# Altium PCB PCB1.PcbDoc
Units mil, origin at the board's own origin, x right, y up, seen from the top; angles counter-clockwise.
Board outline 1683.57 x 2460.03 mil, 2 copper layers (Top Layer, Bottom Layer); 24 components, 14 nets, 72 pads, 13 vias.
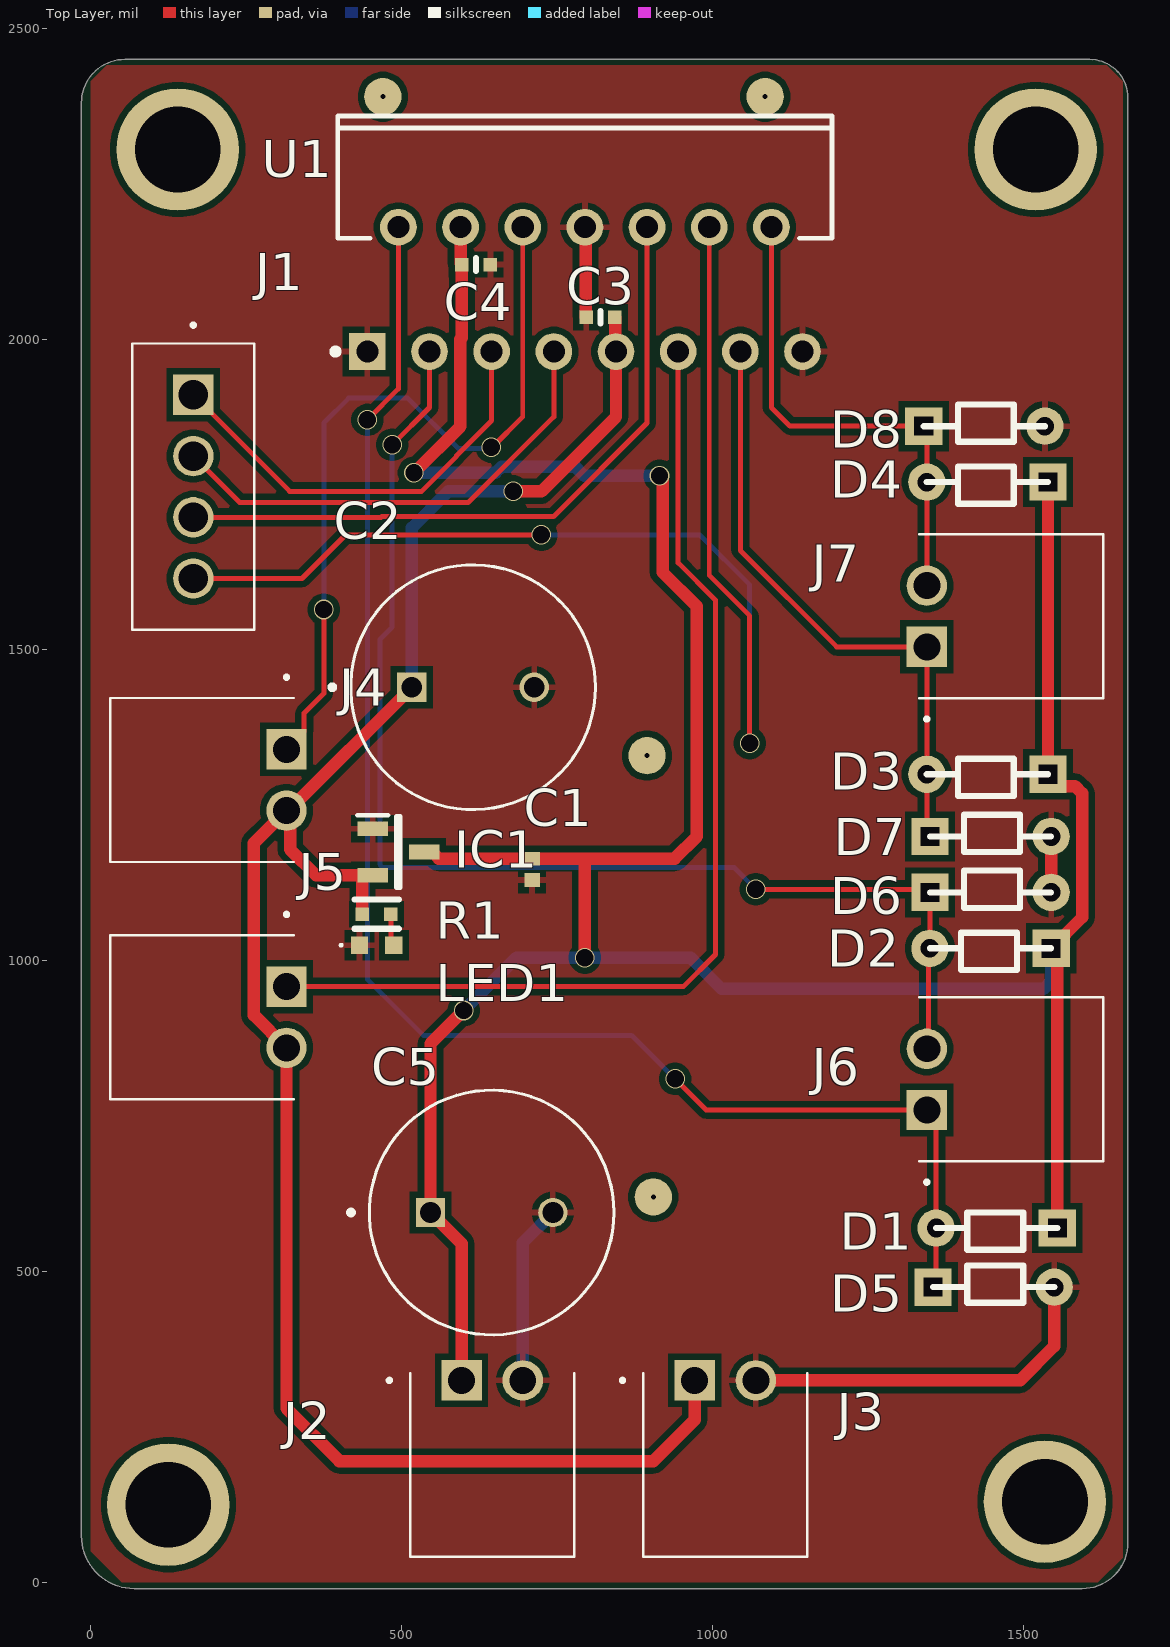
[diagram p0: Top Layer view]
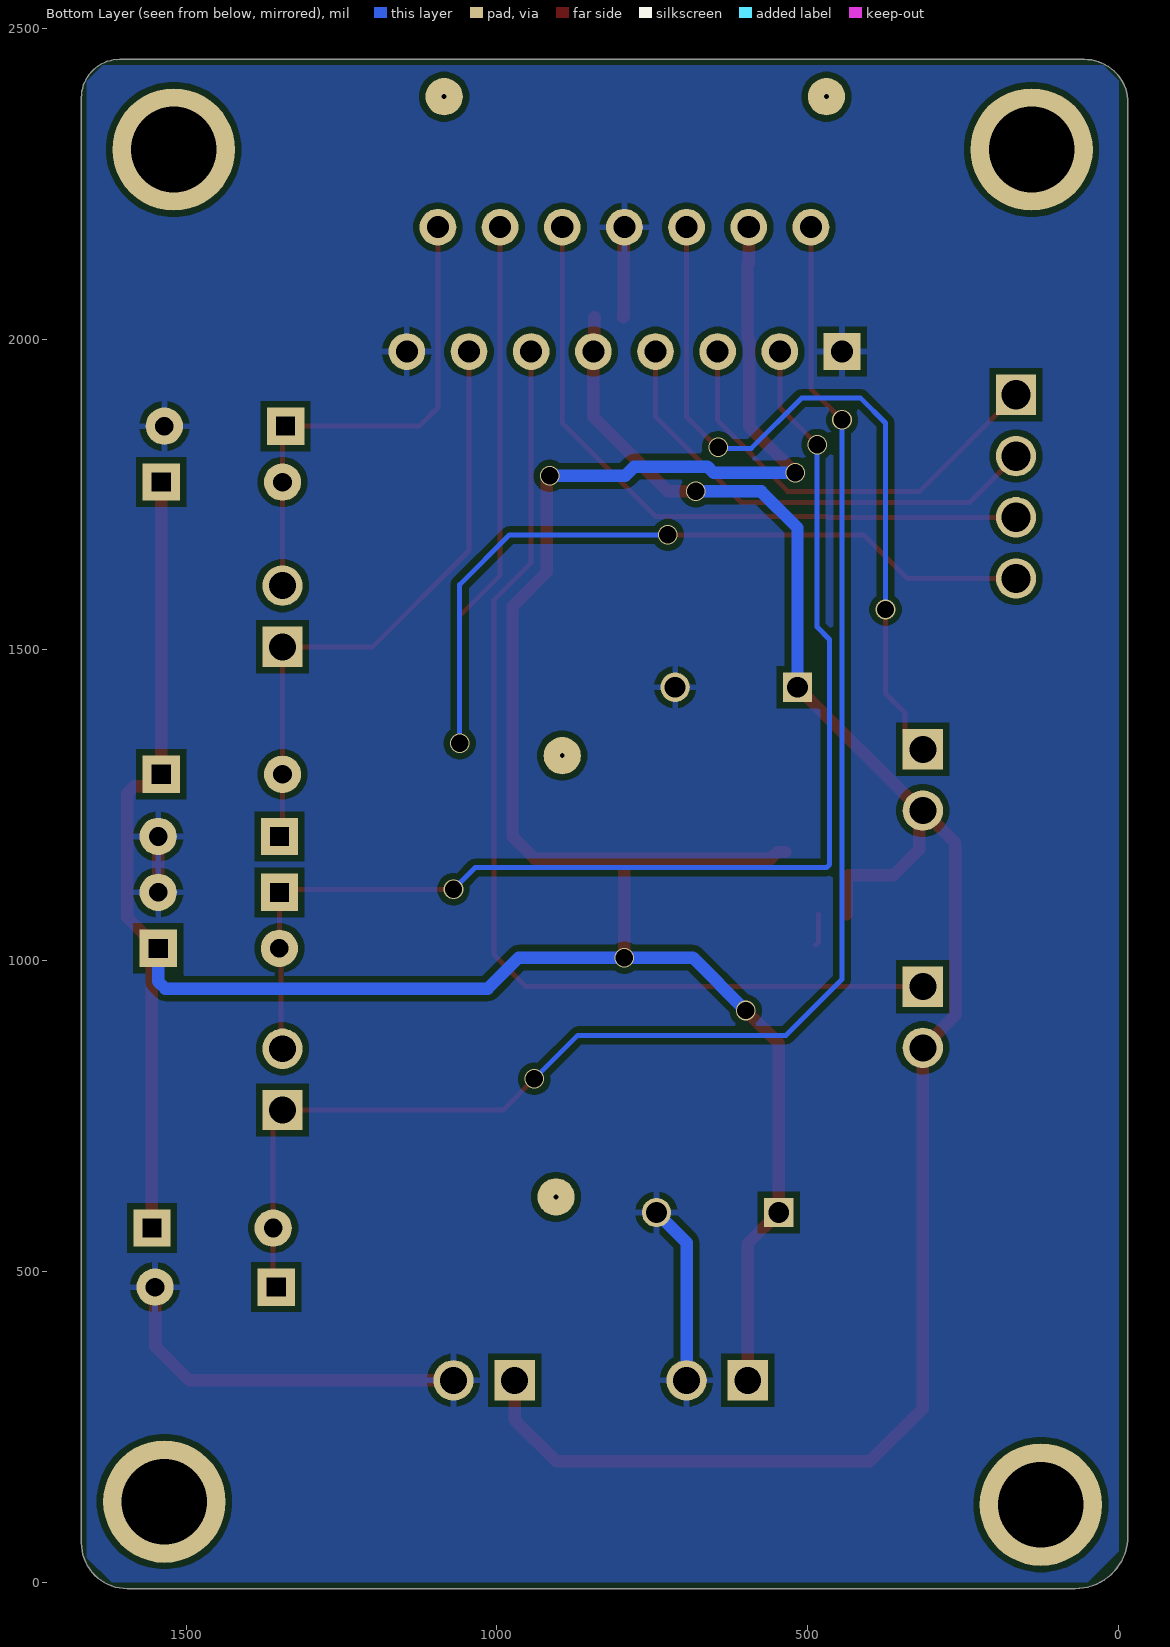
[diagram p1: Bottom Layer view, seen from below]
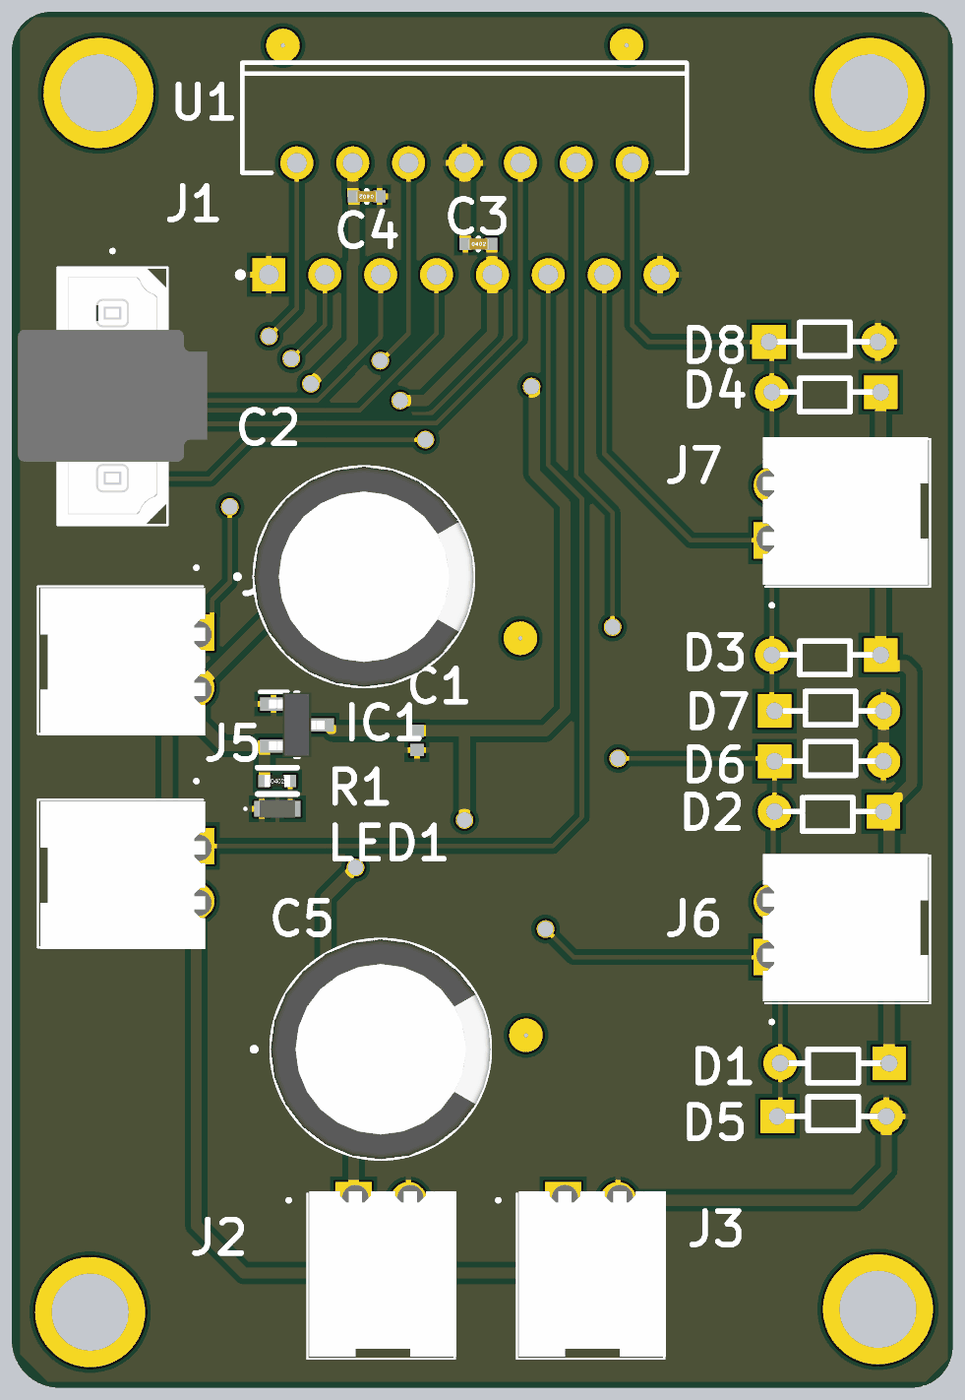
[diagram p2: 3D render of the assembled board from above, using the file's embedded part models]

## Layer stack, top to bottom
Top Solder: solder mask 0.4, Solder Resist, Dk 3.5
Top Layer: signal copper 1.4
Dielectric 1: dielectric 12.6, FR-4, Dk 4.8
Bottom Layer: signal copper 1.4
Bottom Solder: solder mask 0.4, Solder Resist, Dk 3.5

## Board outline
70,-10.01 cw(c70,75) -15.01,75 -15.01,2380 cw(c55,2380) 55,2450.01 1607.09,2450.01 cw(c1607.09,2388.54) 1668.56,2388.54 cw(c1653.54,2388.54) 1668.56,2388.49 1668.56,63.54 cw(c1595,63.54) 1595.06,-10.01 cw(c1595.03,8.37) 1595,-10.01 ccw(c1595.02,5) 1595.06,-10.01 1595,-10.01

## Design rules (kind name [scope] priority, off if disabled: settings)
Clearance [All] p1: gap=10 ignorepadtopadclearanceinfootprint=FALSE except(0: Arc-Hole Track-Hole SMDPad-Hole THPad-Hole Via-Hole Fill-Hole Poly-Hole Region-Hole Text-Hole)
PolygonConnect [All] p1: connectstyle=Relief reliefconductorwidth=10 reliefentries=4 polygonreliefangle="90 Angle" airgapwidth=10
RoutingVias [All] p1: holewidth=28.74 width=31.5 viastyle="Through Hole" minholewidth=7.87 minwidth=19.68 maxholewidth=29.53 maxwidth=31.5
SolderMaskExpansion [All] p1: expansion=4 istentingtop=FALSE
Width [All] p1: maxlimit=100 minlimit=6 preferedwidth=10 minimp=50.000000 maximp=50.000000 favimp=50.000000
30 further rules are at their usual default settings.

## Classes and differential pairs
component class Sheet1: C1 C2 C3 C4 C5 D1 D2 D3 D4 D5 D6 D7 D8 IC1 J1 LED1 R1 U1

## Components (designator, comment, footprint, x,y, rotation, side; value= is the part's Value field where it differs from the comment)
C1 "GRM155R61H105KE05D" CAPC1005X60N 710,1147.13 r90 top
C2 "ECA1HM221" CAPPRD500W60D1000H1250 615,1440 r0 top
C3 "0.10µF" SMD-0402C 820,2035 r270 top
C4 "0.10µF" SMD-0402C 620,2120 r90 top
C5 "ECA1HM221" CAPPRD500W60D1000H1250 645,595 r0 top
D1 "1N4007-E3_73" PCBComponent_1 1555,570 r180 top
D2 "1N4007-E3_73" PCBComponent_1 1545,1020 r180 top
D3 "1N4007-E3_73" PCBComponent_1 1540,1300 r180 top
D4 "1N4007-E3_73" PCBComponent_1 1540,1770 r180 top
D5 "1N4007-E3_73" PCBComponent_1 1355,475 r0 top
D6 "1N4007-E3_73" PCBComponent_1 1350,1110 r0 top
D7 "1N4007-E3_73" PCBComponent_1 1350,1200 r0 top
D8 "1N4007-E3_73" PCBComponent_1 1340,1860 r0 top
IC1 "MCP1799T-5002H_TT" SOT95P237X112-3N 495,1175 r0 top
J1 "1815280" 1815280 165,1910.28 r270 top
J2 "1814841" 1814841 596.57,325 r0 top
J3 "1814841" 1814841 971.57,325 r0 top
J4 "1814841" 1814841 315,1340 r270 top
J5 "1814841" 1814841 315,958.43 r270 top
J6 "1814841" 1814841 1345,760 r90 top
J7 "1814841" 1814841 1345,1505 r90 top
LED1 "LSM0603412V" LSM0603412V 460,1025 r0 top
R1 "1k" SMD-0402-RES 460,1075 r270 top
U1 "L298N" STM-FM-15 795,2080 r90 top

## Footprints (in the part's own frame and the unit in brackets; to place one, negate y for a bottom-side part, rotate by r counter-clockwise, add the part's x,y. Pads: shape width x height; smd on the part's side, far side on the other; paste and mask are expansions set on the pad)
1814841 [mm]
  rect 1.65x1.65 hole 1.1: 1(0,0)
  round 1.65 hole 1.1: 2(2.5,0)
  silkscreen extent -3,-7.2 4.6,0.3, body extent -2.02,-7.1 4.68,0.7, height 5.5
1815280 [mm]
  rect 1.65x1.65 hole 1.2: 1(0,0)
  round 1.65 hole 1.2: 2(2.5,0) 3(5,0) 4(7.5,0)
  silkscreen extent -2.9,-2.5 9.6,2.5, body extent -2.13,-4.3 9.57,4.3, height 8.2
CAPC1005X60N [mm]
  rect 0.56x0.63 smd: 1(-0.435,0) 2(0.435,0)
CAPPRD500W60D1000H1250 [mm]
  round 1.2 hole 0.85: N(2.5,0)
  rect 1.2x1.2 hole 0.85: P(-2.5,0)
  silkscreen extent -5.85,-5 5,5, body extent -5,-5 5,5, height 12.5
LSM0603412V [mm]
  rect 0.7x0.7 smd: 1(-0.7,0) 2(0.7,0)
  silkscreen extent -1.5,-0.05 -1.4,0.05, body extent -0.8,-0.4 0.8,0.4, height 0.75
PCBComponent_1 [mil]
  rect 60x60 hole 30 square: 1(0,0)
  round 60 hole 30: 2(195,0)
  silkscreen extent 0,-25 195,35
SMD-0402-RES [mm]
  rect 0.55x0.55 smd: 1(0,0.584) 2(0,-0.584)
  silkscreen extent -0.6,-0.9 0.6,0.9, body extent -0.28,-0.57 0.27,0.58, height 0.41
SMD-0402C [mm]
  rect 0.55x0.55 smd: 1(0,0.584) 2(0,-0.584)
  silkscreen extent -0.25,0 0.25,0, body extent -0.25,-0.51 0.25,0.51, height 0.51
SOT95P237X112-3N [mm]
  rect 1.25x0.6 smd: 1(-1.05,0.95) 2(-1.05,-0.95) 3(1.05,0)
  silkscreen extent -1.68,-1.46 0.08,1.5, body extent -1.27,-1.46 1.27,1.46, height 1
STM-FM-15 [mm] "FM, 15-Leads, Body 20.2x5mm, Pitch 1.27mm"
  rect 1.5x1.5 hole 0.9: 1(-2.54,8.89)
  round 1.5 hole 0.9: 2(2.54,7.62) 3(-2.54,6.35) 4(2.54,5.08) 5(-2.54,3.81) 6(2.54,2.54) 7(-2.54,1.27) 8(2.54,0) 9(-2.54,-1.27) 10(2.54,-2.54) 11(-2.54,-3.81) 12(2.54,-5.08) 13(-2.54,-6.35) 14(2.54,-7.62) 15(-2.54,-8.89)
  silkscreen extent -2.66,-10.1 7.09,10.31, body extent -2.8,-10.1 7.09,10.1, height 21

## Part data
C1: "Capacitor Ceramic Multilayer (MLCC)", Package=None, Availability=Unavailable, MF="{'manufacturer': u'Murata'}", MP=GRM155R61H105KE05D, Price=None
C2 C5: "M-A", Package=None, Availability=Unavailable, MF="{'manufacturer': u'Panasonic'}", MP=ECA1HM221, Price=None
C3 C4: library part GRM155R61H104KE14D, "CAP CER 0.1UF 50V X5R 0402", Digi-Key Part Number=490-10697-1-ND, Manufacturer="Murata Electronics North America", Operating Temperature="-55°C ~ 85°C", Package / Case="0402 (1005 Metric)", Ratings=-, Temperature Coefficient=X5R, Tolerance=±10%, Voltage=50V, @ qty=0, Applications="General Purpose", Datasheets=http://www.murata.com/~/media/webrenewal/support/library/catalog/products/capacitor/mlcc/c02e.pdf, Factory Stock=0, Features=-, Height - Seated (Max)=-, Image=//media.digikey.com/Renders/Murata%20Renders/ZRB-SERIES-0402.jpg, Lead Spacing=-, Lead Style=-, Minimum Quantity=1, Mounting Type="Surface Mount, MLCC", Packaging="Cut Tape (CT)", Part Number=GRM155R61H104KE14D, Part Status=Active, Quantity Available=329219, Series=GRM, Size / Dimension="0.039\" L x 0.020\" W (1.00mm x 0.50mm)", Thickness (Max)="0.022\" (0.55mm)", Unit Price (USD)=0.1
D1 D2 D3 D4 D5 D6 D7 D8: "Diode", Arrow Part Number=1N4007-E3/73, Manufacturer_Name=Vishay, Mouser Part Number=625-1N4007-E3/73, Arrow Price/Stock=https://www.arrow.com/en/products/1n4007-e373/vishay?region=europe, Datasheet Link=https://mouser.componentsearchengine.com/Datasheets/2/1N4007-E3_73.pdf, Manufacturer_Part_Number=1N4007-E3/73, Mouser Price/Stock=https://www.mouser.co.uk/ProductDetail/Vishay-General-Semiconductor/1N4007-E3-73?qs=N4vtoAxH%2FSqT3Ng3e4K0Gw%3D%3D
IC1: "Integrated Circuit", Arrow Part Number=MCP1799T-5002H/TT, Manufacturer_Name=Microchip, Mouser Part Number=579-CP1799T-5002H/TT, Arrow Price/Stock=https://www.arrow.com/en/products/mcp1799t-5002htt/microchip-technology?region=nac, Datasheet Link=https://eu.mouser.com/datasheet/2/268/MCP1799-Data-Sheet-20006248A-1658571.pdf, Height=1.12mm, Manufacturer_Part_Number=MCP1799T-5002H/TT, Mouser Price/Stock=https://www.mouser.co.uk/ProductDetail/Microchip-Technology/MCP1799T-5002H-TT?qs=BJlw7L4Cy7%2Fnzou%252BAWMPCQ%3D%3D
J1: "Connector", Manufacturer_Name="Phoenix Contact", Mouser Part Number=651-1815280, Arrow Part Number=1815280, Arrow Price/Stock=https://www.arrow.com/en/products/1815280/phoenix-contact?region=nac, Datasheet Link=http://www.phoenixcontact.com/de/produkte/1815280/pdf, Height=7.65mm, Manufacturer_Part_Number=1815280, Mouser Price/Stock=https://www.mouser.co.uk/ProductDetail/Phoenix-Contact/1815280?qs=eTPcRhULBzzcAjjk%252B9Eddw%3D%3D
J2 J3 J4 J5 J6 J7: "Connector", Manufacturer_Name="Phoenix Contact", Mouser Part Number=651-1814841, Arrow Part Number=1814841, Arrow Price/Stock=https://www.arrow.com/en/products/1814841/phoenix-contact?region=nac, Datasheet Link=http://www.phoenixcontact.com/de/produkte/1814841/pdf, Height=5.1mm, Manufacturer_Part_Number=1814841, Mouser Price/Stock=https://www.mouser.co.uk/ProductDetail/Phoenix-Contact/1814841?qs=eTPcRhULBzwaAeA3B4lirA%3D%3D
LED1: "LED", Manufacturer_Name="Visual Communications Company", Mouser Part Number=593-LSM0603412V, Arrow Part Number=LSM0603412V, Arrow Price/Stock=https://www.arrow.com/en/products/lsm0603412v/visual-communications?region=nac, Datasheet Link=https://vcclite.com/wp-content/uploads/wpallimport/files/files/LSM0603412V.pdf, Height=0.65mm, Manufacturer_Part_Number=LSM0603412V, Mouser Price/Stock=https://www.mouser.co.uk/ProductDetail/VCC/LSM0603412V?qs=%252BEew9%252B0nqrCIKpXilSWEhA%3D%3D
R1: library part ERJ-2GEJ102X, "RES SMD 1K OHM 5% 1/10W 0402", Digi-Key Part Number=P1.0KJCT-ND, Manufacturer="Panasonic Electronic Components", Operating Temperature="-55°C ~ 155°C", Package / Case="0402 (1005 Metric)", Power (Watts)="0.1W, 1/10W", Supplier Device Package=0402, Temperature Coefficient=±200ppm/°C, Tolerance=±5%, @ qty=1500, Composition="Thick Film", Datasheets=http://industrial.panasonic.com/www-cgi/jvcr13pz.cgi?E+PZ+3+AOA0001+ERJ2GEJ102X+7+WW, Factory Stock=0, Failure Rate=-, Features="Automotive AEC-Q200", Height - Seated (Max)="0.016\" (0.40mm)", Image=//media.digikey.com/Photos/Panasonic%20Photos/ERJ-PA2-Series.jpg, Minimum Quantity=1, Number of Terminations=2, Packaging="Cut Tape (CT)", Part Number=ERJ-2GEJ102X, Part Status=Active, Quantity Available=1939857, Series=ERJ, Size / Dimension="0.039\" L x 0.020\" W (1.00mm x 0.50mm)", Unit Price (USD)=0.00350
U1: library part CMP-2000-06526-1, "Dual Full-Bridge Driver, 4.8 to 46 V, -40 to 150 degC, 15-Pin FM (MW 15L), RoHS, Tube", Driver Case Style=Multiwatt, Manufacturer=STMicroelectronics, Operating Temperature Max=130°C, Operating Temperature Min=-25°C, Output Current=2A, Output Voltage=46V, Package Description="15-Pin Flange Mount, Body 5 x 19.6 mm, Pitch 1.27 mm", Package Reference=FM-15, PartNumber=L298, Supply Voltage Max=7V, Supply Voltage Min=4.5V, Automotive Qualification Standard=-, Datasheet URL=https://datasheet.ciiva.com/15109/getdatasheetpartid-50682-15109332.pdf, Datasheet Version=01/2000, Manufacturer URL=http://www.st.com/, Motor Type=FullBridge, Mounting Technology=ThroughHole, MSL=-, No. of Outputs=4Outputs, No. of Pins=15Pins, Packaging=Each, Product Range=-, SVHC=NoSVHC(17-Dec-2015)

## Free pads (board coordinates)
  round 196.85 hole 137.8: 13(125,125) 13(140,2305) 13(1520,2305) 13(1535,130)
  round 60 hole 8: 14(470,2390) 15(1085,2390)
  round 60 hole 8 unplated: 16(895,1330) 17(905,620)

## Via types
v1: diameter 31.5, hole 28, Top Layer to Bottom Layer, 13 vias

## Nets (pads, with @x,y where several pads share a name; then routed paths per layer and width w, separated by ;. In a path a pad name is that pad's centre, name@x,y a point inside that pad or via, vN(x,y) a via of type N, cw(c..) or ccw(c..) an arc to the next point about the centre after c; other vN are vias at no path point)
+5V: C2.P C3.1 IC1.2 J3.1 J4.2 J5.2 R1.2 U1.9 | length 3151
  Top Layer w20: R1.2 437,1135.6 435,1137.6 362.4,1137.6 320.91,1179.09 320.91,1235.67 J4.2 ; C2.P 318.15,1241.57 J4.2 ; v1(680,1755) 725,1755 845,1875 U1.9 843.83,1981.17 843.83,2034.17 C3.1 ; J3.1 971.57,261.57 905,195 400,195 315,280 J5.2 262.52,912.48 262.52,1189.09 J4.2
  Bottom Layer w20: C2.P 516.57,1696.57 575,1755 v1(680,1755)
EN-A: J4.1 U1.6 | length 1245.9
  Top Layer w8: J4.1 343.48,1368.48 343.48,1398.48 375,1430 v1(375,1565) ; v1(644.25,1826.38) 646.38,1826.38 695,1875 U1.6
  Bottom Layer w8: v1(375,1565) 375,1865 415,1905 510,1905 590.75,1824.25 642.12,1824.25 v1(644.25,1826.38)
EN-B: J5.1 U1.11 | length 1706.2
  Top Layer w8: J5.1 953.43,958.43 1005,1010 1005,1580 945,1640 U1.11
GND: C1.1 C2.N C3.2 C4.2 C5.N D5.2 D6.2 D7.2 D8.2 IC1.1 J2.2 J3.2 LED1.1 U1.1 U1.8 U1.15 | length 1123.7
  Top Layer w20: U1.8 796.17,2178.83 796.17,2035.83 C3.2 ; J3.2 1495,325 1550,380 D5.2 ; D6.2 D7.2
  Bottom Layer w20: J2.2 695,546.57 C5.N
INPUT1: J1.1 U1.5 | length 703
  Top Layer w8: J1.1 320.02,1755.25 532.32,1755.25 588.66,1811.59 588.66,1812.87 645,1869.21 U1.5
INPUT2: J1.2 U1.7 | length 773
  Top Layer w8: J1.2 239.6,1737.25 607.25,1737.25 745,1875 U1.7
INPUT3: J1.3 U1.10 | length 1107.8
  Top Layer w8: J1.3 467.37,1713.43 468.69,1714.75 744.75,1714.75 895,1865 U1.10
INPUT4: J1.4 U1.12 | length 2069.1
  Top Layer w8: J1.4 340,1615 410,1685 v1(725,1685) ; U1.12 995,1620 1060,1555 v1(1060,1350)
  Bottom Layer w8: v1(725,1685) 980,1685 1060,1605 v1(1060,1350)
NetLED1_2: LED1.2 R1.1 | length 51.9
  Top Layer w8: R1.1 483,1029.56 LED1.2
OUTPUT1: D1.2 D5.1 J6.1 U1.2 | length 2511
  Top Layer w8: v1(445,1870) 495,1920 U1.2 ; v1(940,810) 990,760 J6.1 1360,745 D1.2 1360,480 D5.1
  Bottom Layer w8: v1(445,1870) 445,970 535,880 870,880 v1(940,810)
OUTPUT2: D2.2 D6.1 J6.2 U1.3 | length 2015.6
  Top Layer w8: v1(485,1830) 545,1890 U1.3 ; v1(1070,1115) 1345,1115 D6.1 D2.2 1347.5,1017.5 1347.5,860.93 J6.2
  Bottom Layer w8: v1(485,1830) 485,1536.82 465,1516.82 465,1154.69 469.69,1150 1035,1150 v1(1070,1115)
OUTPUT3: D3.2 D7.1 J7.1 U1.13 | length 991.3
  Top Layer w8: U1.13 1045,1660 1200,1505 J7.1 D3.2 1345,1205 D7.1
OUTPUT4: D4.2 D8.1 J7.2 U1.14 | length 806.1
  Top Layer w8: U1.14 1095,1890 1125,1860 D8.1 1345,1855 D4.2 J7.2
VCC: C1.2 C4.1 C5.P D1.1 D2.1 D3.1 D4.1 IC1.3 J2.1 U1.4 | length 5013.1
  Top Layer w20: v1@520,1784.25 v1(520,1785) 594.53,1859.53 594.53,1999.57 597,2002.04 C4.1 595,2122 U1.4 ; IC1.3 549.13,1175 559.88,1164.25 C1.2@708.62,1164.25 ; J2.1 596.57,545 C5.P 546.57,866.57 v1(600,920) ; C1.2 795,1164.25 ; v1(795,1005) 795,1164.25 ; v1(915,1780) 920,1775 920,1625 975,1570 975,1200 939.25,1164.25 795,1164.25 ; D4.1 D3.1 1559.14,1280.86 1583.28,1280.86 1595,1269.14 1595,1070 D2.1 1555,1010 D1.1
  Bottom Layer w20: v1(520,1785) 651.36,1785 661.36,1795 778.91,1795 793.91,1780 v1(915,1780) ; v1(600,920) 685,1005 v1(795,1005) 965,1005 1015,955 1533.28,955 1545,966.72 D2.1

## Polygon pours and split planes (outlines as drawn)
GND on Top Layer "GND_L01_P000" (solid, pour order 0): 1634.06,2440.94 1660,2415 1660,40 1620,0 50,0 0,50 0,2415 25.94,2440.94 50,2440.94
GND on Bottom Layer "GND_L02_P001" (solid, pour order 1): 25,2440.94 1635,2440.94 1635,2440 1660,2415 1660,40 1620,0 50,0 0,50 0,2415.94

## Silkscreen, mask and mechanical layers (free items; w line width, h text height)
Mechanical 1:
  lines w30: 0,1580 0,2380 cw(c55,2380) 55,2435 1607.09,2435 cw(c1607.09,2388.54) 1653.54,2388.54 1653.54,63.54 cw(c1595,63.54) 1595,5 70,5 cw(c70,75) 0,75 0,1600.63